# Altium PCB PJ1301-MAINPCB.PcbDoc (part 2 of 4)
Units mm, origin at the board's own origin, x right, y up, seen from the top; angles counter-clockwise.
Board outline 163.83 x 187.81 mm, 4 copper layers (Top Layer, GND, POWER, Bottom Layer); 435 components, 348 nets, 1618 pads, 913 vias.
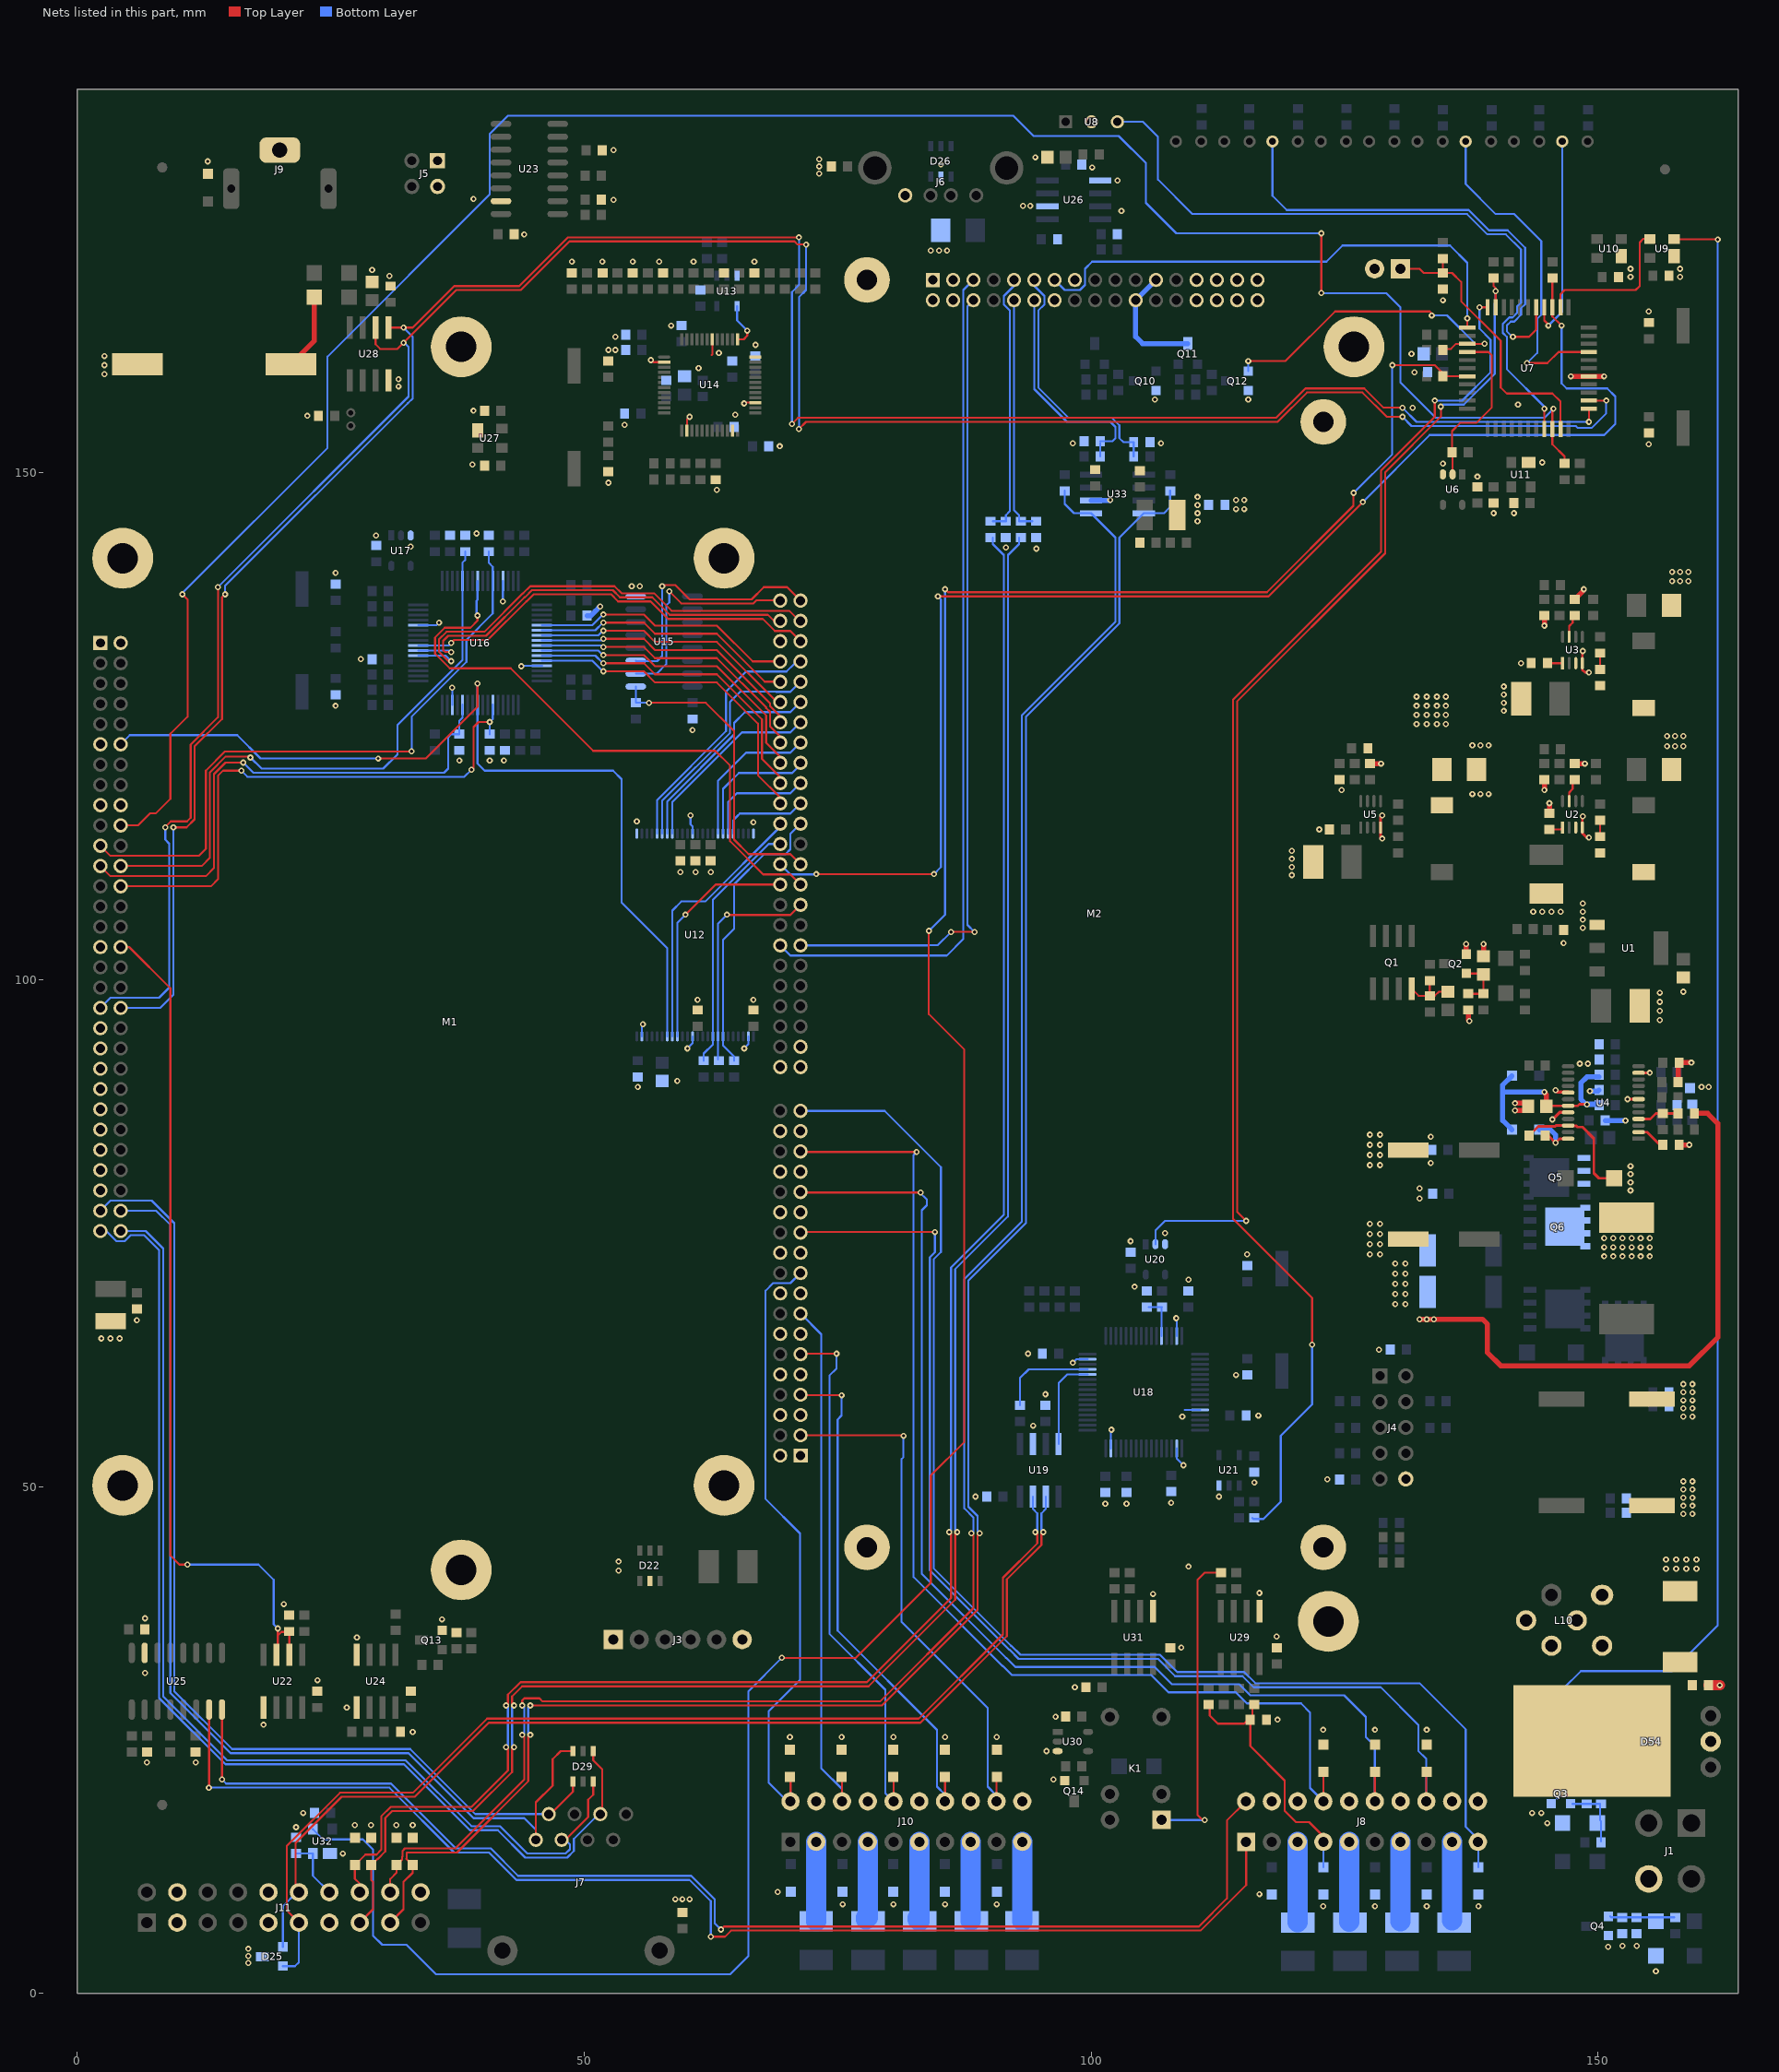
[diagram p4: the nets of this part, all layers, seen from the top]

## Part data
BT1: "Multicell Battery"
C1 C2 C4 C5 C6 C7 C9 C10 C11 C15 C17 C18 C22 C23 C25 C29 C30 C37 C39 C41 C44 C51 C53 C58 C59 C60 C61 C62 C63 C79 C80 C81 C82 C83 C84 C89 C91 C112 C115: library part "CAP NP_Dup2"
C3 C8 C16 C19 C20 C26 C38 C116: library part "CAP WP"
C12 C13 C46 C48 C50 C101 C102 C103 C104 C105 C106 C107 C108 C109 C110 C111 C120 C121 C122 C124 C125 C126: library part CAP
C14 C24 C27 C33 C35 C36 C40 C45 C47 C49 C55 C56 C57 C64 C65 C66 C67 C68 C71 C72 C73 C74 C75 C76 C77 C78 C90 C92 C93 C94 C95 C96 C97: library part Cap, "Capacitor"
C28 C31: library part 06033C223KAT1A_0
C32: library part 06033C103KAT2A
C34: library part 06035A470KAT1A_0
C42 C43: library part 06033C103KAT2A_0
C52 C54 C69 C70 C85 C86 C98 C99 C113 C114 C117 C118 C119: library part CAP_Dup1
C87 C88 C100 C123 C127 C128 C129 C130: library part "P_CAP NP"
D1 D3 D5 D7 D27 D28 D40 D54: library part 1N4148WS-7-F_SOD323-2
D2 D13 D14 D15 D16 D17 D18 D19 D20 D21 D23 D24: library part LN01401_1
D4 D6 D10: library part MMGZ5231BPTLL34
D8 D9 D11 D12: library part "Diode 11DQ03", "Schottky Rectifier"
D30 D31 D32 D33 D34 D35 D36 D37 D38 D39 D41 D42 D43 D44 D45 D46 D47 D48 D49 D50 D51 D52 D53: library part PESD
F2 F3 F4 F5 F6 F7 F9 F10 F11 F12 F13: library part 2A_32VDC_0467-002
J1 J5: library part "Header 4", "Header, 4-Pin"
J2: library part "Header 2", "Header, 2-Pin"
J3 J6: library part "Header 6", "Header, 6-Pin"
J4: library part "Header 5X2", "Header, 5-Pin, Dual row"
J7: library part NET
J8 J10: library part CON20
J9: library part BNC, "BNC Elbow Connector"
J11: library part "Header 20", "Header, 20-Pin"
K1: library part G5V-1_0
L1 L2 L3 L4: library part 4.7UH_CDH2D09BNP-4R7MC_0.7A_20%
L5 L6 L7 L8 L9: library part INDUCTOR_4
Q1: library part SI4431DY, "P-Channel 30V (D-S)  MOSFET"
Q2 Q3 Q4 Q10 Q12 Q13 Q14: library part MMBT3904_NL_SOT23-3
Q5 Q6 Q7 Q8: library part SI4410DY, "N-Channel 30V (D-S)  MOSFET"
Q9 Q11: library part AO3401L_SOT23-3_0
R1 R2 R3 R4 R5 R6 R11 R12 R13 R14 R15 R17 R18 R19 R20 R21 R23 R25 R28 R29 R31 R32 R33 R34 R35 R36 R37 R38 R39 R40 R41 R42 R43 R44 R45 R46 R47 R48 R49 R50 R51 R52 R101 R102 R106 R156 R157: library part CR16-1003FM
R7 R8 R9 R10 R121 R122 R123 R124 R125 R126 R127 R128 R129 R130 R131 R132 R133 R134 R135 R136 R137 R138 R139 R158 R159: library part R
R22 R24: library part CR16-1241FM
R26: library part CR16-1133FM
R27: library part CR16-8061FM
R30: library part CR16-224JM
R53 R54 R55 R56 R57 R58 R59 R60 R61 R62 R63 R64 R65 R66 R67 R68 R69 R70 R71 R72 R103 R104 R105 R107 R108 R109 R110 R111 R112 R113 R114 R115 R116 R117 R118 R119 R120 R152 R153 R154 R155: library part Res3, "Resistor"
R73 R74 R75 R76 R77 R78 R79 R80 R81 R82 R83 R84 R85 R86 R87 R88 R89 R90 R91 R92 R93 R97 R100: library part R_Dup1
R94: library part RESISTOR
R95 R96 R98 R99 R140 R141 R142 R143 R144 R145 R146 R147 R148 R149 R150 R151: library part P_R
U1: library part LT1963EST-1_4.8
U2 U3 U5: library part MP1482_5
U6 U17 U20 U30: library part 74LVC1G04GW_SOT353-5
U11 U27: library part MAX811
U12: library part K9GBG08U0A
U14: library part upd720114_QFP_4
U16: library part XR16V554IV_4
U18: "STM32 ARM-based 32-bit MCU with 64 Kbytes Flash, 64-pin LQFP, Industrial Temperature"
U22 U24: library part MAX485
U26: library part AP1212
Y1 Y2 Y3 Y4 Y5: library part CRYSTAL

## Free pads (board coordinates)
  round 6 hole 3: MT1(37.897,162.411) MT2(125.933,162.411) MT3(37.897,41.774) MT4(123.393,36.693)

## Via types
v1: diameter 0.6, hole 0.3, Top Layer to Bottom Layer, tented both sides, 912 vias
v2: diameter 0.6, hole 0.3, Top Layer to Bottom Layer, 1 vias

## Nets (pads, with @x,y where several pads share a name; then routed paths per layer and width w, separated by ;. In a path a pad name is that pad's centre, name@x,y a point inside that pad or via, vN(x,y) a via of type N, cw(c..) or ccw(c..) an arc to the next point about the centre after c; other vN are vias at no path point)
3G-LED: D14.2 U7.19 | length 33.2
  Top Layer w0.2: v1(143,160.8) 145,160.8 146.1,161.9 U7.19@149.1,161.9
  Bottom Layer w0.2: D14.2@136.941,182.661 136.941,178.459 139.9,175.5 141.734,175.5 144.4,172.834 144.4,165.566 144,165.166 144,161.8 v1(143,160.8)
485-EN: M1.A32 R122.1 U22.2 U22.3 | length 84.9
  Top Layer w0.2: M1.A32@4.3,103.2 5.131,103.2 9.2,99.131 9.2,43.2 10.1,42.3 v1(10.9,42.3) ; U22.3@19.665,33.4 19.8,33.535 19.8,35.3 ; v1(19.8,36) 19.8,35.3 ; U22.2@20.935,33.4 20.935,35.665 20.165,35.665 19.8,35.3
  Bottom Layer w0.2: v1(10.9,42.3) 17.9,42.3 19.4,40.8 19.4,36.4 v1(19.8,36)
AGND: C127.1 C128.1 C129.2 C130.2 M2.14 M2.15 R146.2 R147.2 R148.2 R149.2 R150.1 U33.6 | length 1.9
  Bottom Layer w0.2: v1@101.865,147.265 v1(101.9,147.3)
  Bottom Layer w0.508: U33.6@100,147.265 v1@101.865,147.265
  other v1: 94.6,142.5 91.6,142.6 110.5,145.2 110.5,146 110.5,146.8 110.5,147.6 98.2,152.9 106.9,152.9
AIN1: D31.2 J8.8 M1.C31 | length 110.3
  Top Layer w0.2: M1.C31@71.352,83.049 71.401,83 v1(82.8,83) ; J8.8@122.907,18.951 D31.2@122.907,21.843
  Bottom Layer w0.2: v1(82.8,83) 82.5,82.7 82.5,41.069 91.269,32.3 91.3,32.3 92.2,31.4 105.937,31.4 107.637,29.7 114.272,29.7 115.372,28.6 120.7,28.6 121.6,27.7 121.6,20.259 J8.8@122.907,18.951
AIN2: D32.2 J8.12 M1.C27 | length 111.3
  Top Layer w0.2: M1.C27@71.352,79.049 71.401,79 v1(83.2,79) ; J8.12@127.987,18.951 D32.2@127.987,21.837
  Bottom Layer w0.2: v1(83.2,79) 83.1,79 83.8,78.3 83.8,77.751 83.3,77.251 83.3,41.4 91.6,33.1 91.631,33.1 92.531,32.2 106.269,32.2 107.969,30.5 114.603,30.5 115.703,29.4 124.966,29.4 127.1,27.266 127.1,25.3 127.987,24.413 J8.12@127.987,18.951
AIN3: D33.2 J8.16 M1.C23 | length 112
  Top Layer w0.2: M1.C23@71.403,75.1 v1(84.6,75.1) ; J8.16@133.067,18.951 D33.2@133.067,21.817
  Bottom Layer w0.2: v1(84.6,75.1) 84.6,73.1 84.1,72.6 84.1,41.734 91.934,33.9 91.963,33.9 92.863,33 106.6,33 108.3,31.3 114.934,31.3 116.034,30.2 128.566,30.2 132.267,26.498 132.267,23.933 133.067,23.133 J8.16@133.067,18.951
AIN4: D34.2 J10.2 M1.C19 | length 60.6
  Top Layer w0.2: J10.2@70.361,18.951 D34.2@70.361,21.289
  Bottom Layer w0.2: J10.2@70.361,18.951 70.049,18.951 68.2,20.8 68.2,27.834 71.3,30.934 71.3,45.366 67.9,48.766 67.9,69.3 68.649,70.049 70.352,70.049 M1.C19@71.352,71.049
AIN5: D41.2 J10.6 M1.C15 | length 52.2
  Top Layer w0.2: J10.6@75.441,18.951 D41.2@75.441,21.309
  Bottom Layer w0.2: M1.C15@71.352,67.049 71.366,67.049 73.4,65.015 73.4,22.207 75.441,20.166 J10.6@75.441,18.951
AIN6: D42.2 J10.10 M1.C11 | length 52.9
  Top Layer w0.2: M1.C11@71.403,63.1 v1(74.9,63.1) ; J10.10@80.521,18.951 D42.2@80.521,21.329
  Bottom Layer w0.2: v1(74.9,63.1) 74.9,61.634 74.2,60.934 74.2,35.466 79.721,29.944 79.721,19.751 J10.10@80.521,18.951
AIN7: D43.2 J10.14 M1.C7 | length 51.1
  Top Layer w0.2: M1.C7@71.352,59.049 71.401,59 v1(75.4,59) ; J10.14@85.601,18.951 D43.2@85.6,21.35
  Bottom Layer w0.2: v1(75.4,59) 75.4,57 75,56.6 75,35.797 84.8,25.997 84.8,20.4 85.601,19.599 J10.14@85.601,18.951
AIN8: D44.2 J10.18 M1.C3 | length 52.6
  Top Layer w0.2: M1.C3@71.352,55.049 81.451,55.049 v1(81.5,55) ; J10.18@90.681,18.951 D44.2@90.681,21.331
  Bottom Layer w0.2: v1(81.5,55) 81.5,52.9 81.3,52.7 81.3,36.666 89.8,28.166 89.8,20.4 90.681,19.519 J10.18@90.681,18.951
ALARM-LED: D20.2 U7.27 | length 47.2
  Top Layer w0.2: v1(141.6,163.4) 143.2,163.4 143.9,164.1 U7.27@143.9,166.3
  Bottom Layer w0.2: D20.2@117.891,182.661 117.891,177.309 119.3,175.9 137.237,175.9 139.237,173.9 141.072,173.9 142.8,172.172 142.8,166.6 142.4,166.2 142.4,165.566 141.734,164.9 141.4,164.9 141,164.5 141,163.951 141.552,163.4 v1(141.6,163.4)
ALARM-SW: R139.2 U7.40 U32.3 | length 272
  Top Layer w0.2: v1(69.5,33.1) 76.8,33.1 84.2,40.5 84.2,51.1 87.5,54.4 87.5,93.1 84,96.6 v1(84,104.8) ; v1(85.6,138.5) 85.9,138.2 117.334,138.2 125.867,146.733 125.867,147.967 v1(125.9,148) ; v1(129.7,160.6) 133.9,160.6 134.7,159.8 R139.2@134.7,159.5 U7.40@137.1,159.5
  Bottom Layer w0.2: U32.3@23.25,16.2 24.25,15.2 28.2,15.2 29.2,14.2 29.2,5.7 30.1,4.8 32.5,4.8 35.4,1.9 64.4,1.9 66.2,3.7 66.2,29.8 v1(69.5,33.1) ; v1(84,104.8) 85.6,106.4 v1(85.6,138.5) ; v1(125.9,148) 129.7,151.8 v1(129.7,160.6)
ALARM-SW-IN: C126.1 J11.14 U32.2 | length 6.1
  Bottom Layer w0.2: C126.1@21.6,13.8 U32.2@23.25,13.8 23.25,11.614 J11.14@24.883,9.981
AOUT: D30.2 J8.19 M1.C35 | length 129.1
  Bottom Layer w0.2: M1.C35@71.352,87.049 79.651,87.049 85.2,81.5 85.2,73.134 84.5,72.434 84.5,41.9 92.1,34.3 92.128,34.3 93.028,33.4 106.8,33.4 108.5,31.7 115.1,31.7 116.2,30.6 125.1,30.6 132.4,30.6 136.947,26.053 136.947,16.453 138.147,15.253 J8.19@138.147,14.951 ; D30.2@138.2,12.45 J8.19@138.2,14.899
AUD-IN_N: D51.2 J11.16 R144.2 | length 186.6
  Top Layer w0.2: J11.16@27.884,9.981 27.884,10.817 27.4,11.3 D51.2@27.4,12.65 28.442,13.692 29.526,13.692 30,14.166 30,17.466 30.934,18.4 38.9,18.4 42.5,22 42.5,24.1 v1(42.3,24.3) ; v1(42.3,28.4) 42.4,28.4 42.5,28.5 42.5,29.466 43.734,30.7 77.9,30.7 86.2,39 86.2,45.3 v1(86,45.5)
  Bottom Layer w0.2: v1(42.3,24.3) 42.5,24.5 v1@42.5,28.4 ; v1(86,45.5) 86.2,45.7 86.2,71.6 91.4,76.8 91.4,141.891 91.391,141.9 91.351,141.9 90.3,142.951 R144.2@90.3,143.6
AUD-IN_P: D50.2 J11.15 R143.2 | length 188.9
  Top Layer w0.2: J11.15@27.884,6.981 29.2,8.297 29.2,11 29,11.2 D50.2@29,12.65 29.642,13.292 29.692,13.292 30.4,14 30.4,17.3 31.1,18 39.066,18 42.9,21.834 42.9,24.1 v1(43.1,24.3) ; v1(43.1,28.4) 43,28.4 42.9,28.5 42.9,29.3 43.9,30.3 78.066,30.3 86.6,38.834 86.6,45.3 v1(86.8,45.5)
  Bottom Layer w0.2: v1@42.9,28.4 42.9,24.5 v1(43.1,24.3) ; v1(86.8,45.5) 86.6,45.7 86.6,71.434 91.8,76.634 91.8,141.891 91.809,141.9 91.849,141.9 92.9,142.951 R143.2@92.9,143.6
AUD-OUT_N: D53.2 J11.18 R141.2 U33.5 | length 196.1
  Top Layer w0.2: J11.18@30.883,9.981 30.883,11.284 31.5,11.9 D53.2@31.5,12.65 32.058,13.208 32.058,13.457 32.1,13.499 32.1,14.066 32.334,14.3 37.3,14.3 44.1,21.1 44.1,25.3 v1(43.9,25.5) ; v1(43.9,28.4) 43.9,28.9 44.1,29.1 45.6,29.1 45.9,28.8 79.2,28.8 88.4,38 88.4,45.2 v1(88.2,45.4)
  Bottom Layer w0.2: v1(43.9,25.5) 44.1,25.7 44.1,28.2 v1(43.9,28.4) ; v1(88.2,45.4) 88.3,45.4 88.4,45.5 88.4,46.934 87.5,47.834 87.5,70.466 93.183,76.149 93.183,126.083 102.4,135.3 102.4,143.595 U33.5@100,145.995 98.305,145.995 97.4,146.9 R141.2@97.4,148.2
AUD-OUT_P: D52.2 J11.17 R151.2 U33.4 | length 199.1
  Top Layer w0.2: J11.17@30.883,6.981 32.2,8.297 32.2,11 33.1,11.9 D52.2@33.1,12.65 32.458,13.292 32.5,13.333 32.5,13.9 37.466,13.9 44.5,20.934 44.5,25.3 v1(44.7,25.5) ; v1(44.7,28.4) 79.366,28.4 88.8,37.834 88.8,45.2 v1(89,45.4)
  Bottom Layer w0.2: v1(44.7,25.5) 44.5,25.7 44.5,28.2 v1(44.7,28.4) ; v1(89,45.4) 88.9,45.4 88.8,45.5 88.8,47.1 87.9,48 87.9,70.3 93.583,75.983 93.583,125.917 102.8,135.134 102.8,143.595 U33.4@105.2,145.995 107.195,145.995 107.8,146.6 R151.2@107.8,148.2
BOOT0: R107.2 R108.2 U18.60 | length 4.1
  Bottom Layer w0.2: R108.2@105.7,67.7 R107.2@107,67.7 ; U18.60@106.95,64.85 R107.2@106.95,67.65
C-AUDIO-IN_N: M2.9 R144.1 R147.1 | length 25.9
  Bottom Layer w0.2: R144.1@90.3,145.2 R147.1@91.6,145.2 91.6,145.791 92,146.191 92,165.986 91.4,166.586 91.4,167.414 92.4,168.414 M2.9@92.4,169
C-AUDIO-IN_P: M2.10 R143.1 R146.1 | length 23.3
  Bottom Layer w0.2: M2.10@92.4,167 92.4,146.291 92.9,145.791 92.9,145.2 R146.1@94.2,145.2
C-AUDIO-OUT_N: M2.11 R145.1 R149.1 | length 25.5
  Top Layer w0.2: M2.11@94.4,168.414 M2.11@94.4,169
  Bottom Layer w0.2: M2.11@94.4,169 94.4,168.414 95.4,167.414 95.4,166.586 94.8,165.986 94.8,158.4 97.8,155.4 102.066,155.4 102.8,154.666 102.8,153.4 103.2,153 R149.1@104.2,153 ; R145.1@104.2,151.6 R149.1@104.2,152.9
C-AUDIO-OUT_P: M2.12 R142.1 R148.1 | length 22.3
  Bottom Layer w0.2: M2.12@94.4,167 94.4,158.234 97.634,155 101.9,155 102.4,154.5 102.4,153.4 102.1,153.1 R148.1@100.9,153.1 ; R142.1@100.9,151.6 R148.1@100.9,152.9
C-PWR-CTRL: R39.2 U6.2 U7.37 | length 16.9
  Top Layer w0.2: U6.2@135.65,149.827 135.65,151.95 R39.2@135.6,152 135.6,154.1 136.4,154.9 138,154.9 139.5,156.4 139.5,161.6 139.2,161.9 U7.37@137.1,161.9
CAM1: C120.1 C121.1 D36.2 J8.7 R133.2 | length 25.4
  Top Layer w0.2: C120.1@111.7,28.5 111.7,27.4 112.5,26.6 115.1,26.6 R133.2@115.6,27.1 ; C121.1@115.9,28.5 115.9,27.2 R133.2@115.7,27 115.7,24.4 119.1,21 119.1,18 120.2,16.9 121.5,16.9 122.907,15.493 J8.7@122.907,14.951
  Bottom Layer w0.2: D36.2@122.9,12.45 J8.7@122.9,14.944
CAM1B: K1.1 R131.2 | length 30.9
  Top Layer w0.2: v1(111.2,17.1) 111,17.1 110.5,17.6 110.5,40.8 111.2,41.5 R131.2@112.8,41.5
  Bottom Layer w0.2: K1.1@106.96,17.1 v1(111.2,17.1)
CAN-BOOT: R106.2 U7.32 U20.2 | length 117.5
  Top Layer w0.2: v1(115.3,76.2) 114.4,77.1 114.4,127.434 129,142.034 129,150.034 134.5,155.534 v1(134.5,156.5) ; R106.2@139.7,169.2 139.7,168.4 139.9,168.2 v1(139.9,167.9) U7.32@139.9,166.3
  Bottom Layer w0.2: U20.2@106.35,73.9 106.35,75.25 107.3,76.2 v1(115.3,76.2) ; v1(134.5,156.5) 134.7,156.7 136.766,156.7 139.8,159.734 139.8,166.7 139.9,166.8 v1(139.9,167.9)
CAN-RST: R120.1 U7.33 | length 139.2
  Top Layer w0.2: v1(121.8,64) 121.8,68.6 114,76.4 114,127.6 128.6,142.2 128.6,150.2 133.9,155.5 v1(133.9,157.1) ; v1(138.3,166.3) U7.33@139.1,166.3
  Bottom Layer w0.2: R120.1@115.9,46.9 116,46.8 117,46.8 118.7,48.5 118.7,55 121.8,58.1 v1(121.8,64) ; v1(133.9,157.1) 136.6,157.1 139.4,159.9 139.4,163.1 138.3,164.2 v1(138.3,166.3)
CAN-RXD: U18.44 U19.4 | length 9.2
  Bottom Layer w0.2: U19.4@96.805,54.2 96.805,60.205 97.65,61.05 U18.44@99.65,61.05
CAN-TXD: R104.2 U18.45 | length 9.7
  Bottom Layer w0.2: R104.2@93,58 93,60.7 93.85,61.55 U18.45@99.65,61.55
CAN_N: D25.1 J11.12 U19.6 | length 105.1
  Top Layer w0.2: J11.12@21.883,9.981 21.55,10.314 21.55,14.85 26.1,19.4 33.3,19.4 40.6,26.7 83.166,26.7 91.7,35.234 91.7,40.834 95.1,44.234 95.1,45.3 v1(95.3,45.5)
  Bottom Layer w0.2: D25.1@20.3,4.6 20.3,8.6 21.681,9.981 J11.12@21.883,9.981 ; v1@95.1,45.6 95.1,47.357 95.535,47.792 U19.6@95.535,49
CAN_P: D25.2 J11.11 U19.7 | length 108.1
  Top Layer w0.2: J11.11@21.883,6.981 20.683,8.181 20.683,14.549 25.934,19.8 33.134,19.8 40.434,27.1 83,27.1 91.3,35.4 91.3,41 94.7,44.4 94.7,45.3 v1(94.5,45.5)
  Bottom Layer w0.2: D25.2@20.3,2.695 21.495,2.695 21.883,3.083 J11.11@21.883,6.981 ; U19.7@94.265,49 94.265,47.792 94.7,47.357 v1@94.7,45.6
CELLULAR-PWR: C38.1 L4.2 M2.1 M2.2 M2.3 M2.4 R34.1
  other v1: 132.1,125.2 133.1,125.2 134.1,125.2 135,125.2 132.1,126.1 133.1,126.1 134.1,126.1 135,126.1 132.1,127 133.1,127 134.1,127 135,127 132.1,127.9 133.1,127.9 134.1,127.9 135,127.9
CELLULAR-RESET: M2.13 U7.34 | length 51
  Top Layer w0.2: U7.34@137.1,164.3 v1(137.1,165.2)
  Bottom Layer w0.2: M2.13@96.4,169 97.4,168 98.9,168 99.4,168.5 99.4,170.1 100.1,170.8 123.2,170.8 124.8,172.4 135.4,172.4 137.1,170.7 v1(137.1,165.2)
CP1: F4.2 J8.9 | length 7.9
  Bottom Layer w2: F4.2@125.447,7.086 J8.9@125.447,14.951
CP2: F5.2 J8.13 | length 7.8
  Bottom Layer w2: F5.2@130.527,7.139 J8.13@130.527,14.951
CP3: F6.2 J8.17 | length 7.8
  Bottom Layer w2: F6.2@135.607,7.193 J8.17@135.607,14.951
CP4: F7.2 J10.3 | length 7.8
  Bottom Layer w2: F7.2@72.901,7.101 J10.3@72.901,14.951
CP5: F9.2 J10.7 | length 7.7
  Bottom Layer w2: F9.2@77.8,7.3 F9.2@77.8,7.481 ; F9.2@77.981,7.481 J10.7@77.981,14.951
CP6: F10.2 J10.11 | length 7.9
  Bottom Layer w2: F10.2@82.9,7.461 82.9,7.3 F10.2@83.1,7.1 ; F10.2@83.061,7.461 J10.11@83.061,14.951
CP7: F11.2 J10.15 | length 7.8
  Bottom Layer w2: F11.2@88.141,7.159 J10.15@88.141,14.951
CP8: F12.2 J10.19 | length 7.8
  Bottom Layer w2: F12.2@93.221,7.121 J10.19@93.221,14.951
DPC-RXD: J8.2 U25.8 | length 125.2
  Top Layer w0.2: U25.8@14.29,28 14.29,21.11 v1(14.3,21.1) ; v1(63.5,6.3) 63.8,6.6 110.634,6.6 113.4,9.366 113.4,17.064 J8.2@115.287,18.951
  Bottom Layer w0.2: v1(14.3,21.1) 14.7,20.7 30.966,20.7 37.366,14.3 40.8,14.3 43.5,11.6 60.566,11.6 62.9,9.266 62.9,6.9 v1(63.5,6.3)
DPC-TXD: J8.1 U25.7 | length 124.5
  Top Layer w0.2: v1(13,20.3) 13.02,20.32 U25.7@13.02,28 ; v1(62.5,5.6) 63.9,5.6 64.5,6.2 110.8,6.2 115.287,10.687 J8.1@115.287,14.951
  Bottom Layer w0.2: v1(13,20.3) 30.8,20.3 37.2,13.9 40.634,13.9 43.334,11.2 60.4,11.2 62.5,9.1 v1(62.5,5.6)
DPP: F3.2 J8.5 | length 7.9
  Bottom Layer w2: F3.2@120.367,7.033 J8.5@120.367,14.951
E0RX_N: D29.4 J7.6 M1.A59 | length 110.4
  Top Layer w0.2: D29.4@50.9,23.9 50.9,23 51.8,22.1 51.8,17.89 J7.6@51.6,17.69
  Bottom Layer w0.2: M1.A59@2.3,75.2 2.886,75.2 3.886,74.2 4.714,74.2 5.314,74.8 6.6,74.8 8.1,73.3 8.1,29.134 14.634,22.6 32.234,22.6 38.734,16.1 41.5,16.1 44.2,13.4 48.341,13.4 49,14.059 49,15.234 51.456,17.69 J7.6@51.6,17.69
E0RX_P: D29.3 J7.3 M1.A60 | length 104.5
  Top Layer w0.2: J7.3@47.79,15.15 48.15,15.15 50.4,17.4 50.4,19.1 50.9,19.6 D29.3@50.9,20.9
  Bottom Layer w0.2: M1.A60@4.3,75.2 6.766,75.2 8.5,73.466 8.5,29.3 14.8,23 32.4,23 38.9,16.5 41.7,16.5 44.4,13.8 48.175,13.8 48.6,14.225 48.6,14.7 48.15,15.15 J7.3@47.79,15.15
E0TX_N: D29.1 J7.2 M1.A57 | length 101
  Top Layer w0.2: J7.2@46.52,17.69 46.69,17.69 48.9,19.9 D29.1@48.9,20.9
  Bottom Layer w0.2: M1.A57@2.3,77.2 3.3,78.2 7.366,78.2 9.6,75.966 9.6,52.4 9.6,29.8 15.3,24.1 32.866,24.1 39.276,17.69 J7.2@46.52,17.69
E0TX_P: D29.6 J7.1 M1.A58 | length 105.2
  Top Layer w0.2: J7.1@45.25,15.15 45.25,18.85 46.9,20.5 46.9,23.1 47.7,23.9 D29.6@48.9,23.9
  Bottom Layer w0.2: M1.A58@4.3,77.2 7.8,77.2 9.2,75.8 9.2,52.4 9.2,29.634 15.134,23.7 32.7,23.7 39.11,17.29 44.1,17.29 45.25,16.14 J7.1@45.25,15.15
EBIA0: M1.B43 U16.24 | length 41.7
  Top Layer w0.2: v1(36.9,133.2) 37.2,133.5 40.5,133.5 44.3,137.3 44.331,137.3 45.031,138 52.669,138 53.369,137.3 56.569,137.3 58.297,135.572 67.628,135.572 68.828,134.372 70.352,134.372 M1.B43@71.352,133.372
  Bottom Layer w0.2: U16.24@33.65,132.95 36.65,132.95 v1(36.9,133.2)
EBIA1: M1.B46 U16.23 | length 41.7
  Top Layer w0.2: v1(36.9,132.3) 36.3,132.3 36.1,132.5 36.1,133.4 36.6,133.9 40.334,133.9 44.134,137.7 44.166,137.7 44.866,138.4 52.834,138.4 53.534,137.7 56.734,137.7 58.462,135.972 68.128,135.972 68.728,135.372 M1.B46@69.352,135.372
  Bottom Layer w0.2: U16.23@33.65,132.45 36.75,132.45 v1(36.9,132.3)
EBIA2: M1.B45 U16.22 | length 45.7
  Top Layer w0.2: v1(36.9,131.4) 36.634,131.4 35.7,132.334 35.7,133.566 36.434,134.3 40.169,134.3 43.969,138.1 44,138.1 44.7,138.8 53,138.8 53.7,138.1 56.9,138.1 58.628,136.372 70.228,136.372 70.952,135.648 71.352,135.648 M1.B45@71.352,135.372
  Bottom Layer w0.2: U16.22@33.65,131.95 36.35,131.95 v1(36.9,131.4)
EBIA3: M1.B48 U15.2 | length 22.3
  Top Layer w0.2: v1(58.4,138.3) 59.6,137.1 66.7,137.1 67,137.4 69.324,137.4 M1.B48@69.352,137.372
  Bottom Layer w0.2: U15.2@55.1,130.17 57.17,130.17 58.1,131.1 58.1,136.9 58.4,137.2 v1(58.4,138.3)
EBIA4: M1.B47 U15.3 | length 24.9
  Top Layer w0.2: v1@57.8,138.9 59,138.9 60.4,137.5 66.534,137.5 67.734,138.7 70.024,138.7 M1.B47@71.352,137.372
  Bottom Layer w0.2: U15.3@55.1,131.44 55.14,131.4 57.2,131.4 57.7,131.9 v1(57.7,138.8)
EBICS1: M1.B21 R73.1 U15.1 | length 30.7
  Top Layer w0.2: v1(56.4,127.3) 62,127.3 64.8,124.5 64.8,113.8 66.228,112.372 70.352,112.372 M1.B21@71.352,111.372
  Bottom Layer w0.2: U15.1@55.1,128.9 R73.1@55.1,127.3 v1(56.4,127.3)
EBID0: M1.B42 U16.53 | length 25.9
  Top Layer w0.2: v1(51.9,136) 55.9,136 57,134.9 63.1,134.9 66.628,131.372 M1.B42@69.352,131.372
  Bottom Layer w0.2: U16.53@45.85,134.95 50.801,134.95 51.851,136 v1(51.9,136)
EBID1: M1.B40 U16.54 | length 26.2
  Top Layer w0.2: v1(51.9,135.2) 55.9,135.2 57,134.1 63.1,134.1 67.828,129.372 M1.B40@69.352,129.372
  Bottom Layer w0.2: U16.54@45.85,134.45 51.101,134.45 51.851,135.2 v1(51.9,135.2)
EBID2: M1.B38 U16.55 | length 26.3
  Top Layer w0.2: v1(51.9,134.4) 55.9,134.4 57,133.3 63.1,133.3 M1.B38@69.028,127.372
  Bottom Layer w0.2: U16.55@45.85,133.95 51.401,133.95 51.851,134.4 v1(51.9,134.4)
EBID3: M1.B36 U16.56 | length 27.5
  Top Layer w0.2: v1(51.9,133.6) 55.9,133.6 57,132.5 63.1,132.5 68.352,127.248 68.352,126.958 69.352,125.958 M1.B36@69.352,125.372
  Bottom Layer w0.2: U16.56@45.85,133.45 51.75,133.45 v1(51.9,133.6)
EBID4: M1.B34 U16.57 | length 28.7
  Top Layer w0.2: v1(51.9,132.8) 55.9,132.8 57,131.7 63.1,131.7 67.952,126.848 67.952,126.792 68.352,126.392 68.352,124.958 69.352,123.958 M1.B34@69.352,123.372
  Bottom Layer w0.2: U16.57@45.85,132.95 51.75,132.95 v1(51.9,132.8)
EBID5: M1.B32 U16.58 | length 30
  Top Layer w0.2: v1(51.9,132) 55.9,132 57,130.9 63.1,130.9 67.952,126.048 67.952,123.358 69.352,121.958 M1.B32@69.352,121.372
  Bottom Layer w0.2: U16.58@45.85,132.45 51.401,132.45 51.851,132 v1(51.9,132)
EBID6: M1.B30 U16.59 | length 31.3
  Top Layer w0.2: v1(51.9,131.2) 55.9,131.2 57,130.1 63.1,130.1 67.552,125.648 67.552,121.758 69.352,119.958 M1.B30@69.352,119.372
  Bottom Layer w0.2: U16.59@45.85,131.95 51.101,131.95 51.851,131.2 v1(51.9,131.2)
EBID7: M1.B28 U16.60 | length 32.7
  Top Layer w0.2: v1(51.9,130.4) 55.9,130.4 57,129.3 63.1,129.3 67.152,125.248 67.152,120.158 69.352,117.958 M1.B28@69.352,117.372
  Bottom Layer w0.2: U16.60@45.85,131.45 50.801,131.45 51.851,130.4 v1(51.9,130.4)
EBIOE: M1.B19 U16.40 | length 60.3
  Top Layer w0.2: v1(39.5,135.9) 39.5,135.4 38.8,134.7 36.269,134.7 35.3,133.731 35.3,132.151 36.751,130.7 42.763,130.7 50.9,122.563 62.937,122.563 64.4,121.1 64.4,113.634 67.662,110.372 70.352,110.372 M1.B19@71.352,109.372
  Bottom Layer w0.2: v1(39.5,135.9) 39.4,136 39.4,137.349 39.5,137.449 U16.40@39.5,139.3
EBIWE: M1.A12 U12.18 U16.9 | length 90.9
  Top Layer w0.2: v1(29.7,121.8) 34.4,121.8 39.5,126.9 v1(39.5,129.2)
  Bottom Layer w0.2: M1.A12@4.3,123.2 5.2,124.1 15.8,124.1 18.1,121.8 v1(29.7,121.8) ; v1(39.5,129.2) 39.5,121.3 40.2,120.6 52.863,120.6 53.704,119.759 53.704,107.596 58.2,103.1 U12.18@58.2,94.4
EUARTA-INT: M1.A26 R87.1 U16.6 | length 54.9
  Top Layer w0.2: M1.A26@4.3,109.2 13.2,109.2 13.9,109.9 13.9,120.1 14.4,120.6 v1(16.2,120.6) ; v1(38.9,120.7) 39.1,120.9 39.1,124.9 39.6,125.4 v1(40.7,125.4)
  Bottom Layer w0.2: v1(16.2,120.6) 16.8,120 38.2,120 v1(38.9,120.7) ; R87.1@40.7,124.2 v1(40.7,125.4) 41,125.7 U16.6@41,127.1
EUARTB-INT: M1.A23 R88.1 U16.12 | length 52.7
  Top Layer w0.2: M1.A23@2.3,111.2 3.3,110.2 12.7,110.2 13.5,111 13.5,120.266 14.634,121.4 v1(16.4,121.4)
  Bottom Layer w0.2: v1(16.4,121.4) 17.4,120.4 36.2,120.4 36.6,120.8 36.6,123.9 36.9,124.2 R88.1@37.7,124.2 37.7,125.5 38,125.8 U16.12@38,127.1
EUARTC-INT: M1.A24 R89.1 U16.37 | length 60.6
  Top Layer w0.2: M1.A24@4.3,111.2 12.3,111.2 13.1,112 13.1,120.431 14.669,122 17,122 v1(17.1,121.9)
  Bottom Layer w0.2: v1(17.1,121.9) 18.2,120.8 30.2,120.8 31.6,122.2 31.6,125.1 38,131.5 U16.37@38,139.3 38,141.1 38.3,141.4 R89.1@38.3,142.2
EUARTD-INT: M1.A21 R90.1 U16.43 | length 63.1
  Top Layer w0.2: M1.A21@2.3,113.2 3.3,112.2 12,112.2 12.7,112.9 12.7,120.597 14.603,122.5 v1(33,122.5)
  Bottom Layer w0.2: v1(33,122.5) 33,125.934 38.4,131.334 38.4,133.5 41,136.1 U16.43@41,139.3 41,140.7 40.6,141.1 R90.1@40.6,142.2
FLASH-DB0: M1.B41 U12.29 | length 25.5
  Bottom Layer w0.2: U12.29@57.2,114.4 57.2,117.7 64,124.5 64,128.4 65.972,130.372 69.972,130.372 70.766,131.166 70.766,131.372 M1.B41@71.352,131.372
FLASH-DB1: M1.B39 U12.30 | length 23.6
  Bottom Layer w0.2: U12.30@57.7,114.4 57.7,117.634 64.4,124.334 64.4,127.4 65.4,128.4 68.91,128.4 68.938,128.372 70.352,128.372 M1.B39@71.352,129.372
FLASH-DB2: M1.B37 U12.31 | length 21
  Bottom Layer w0.2: U12.31@58.2,114.4 58.2,117.569 64.8,124.169 64.8,125.3 65.872,126.372 70.352,126.372 M1.B37@71.352,127.372
FLASH-DB3: M1.B35 U12.32 | length 19
  Bottom Layer w0.2: U12.32@58.7,114.4 58.7,117.503 65.569,124.372 70.352,124.372 M1.B35@71.352,125.372
FLASH-DB4: M1.B33 U12.41 | length 14.9
  Bottom Layer w0.2: U12.41@63.2,114.4 63.2,119.6 65.972,122.372 70.352,122.372 M1.B33@71.352,123.372
FLASH-DB5: M1.B31 U12.42 | length 13.2
  Bottom Layer w0.2: U12.42@63.7,114.4 63.7,118.8 65.272,120.372 70.528,120.372 71.352,121.196 M1.B31@71.352,121.372
FLASH-DB6: M1.B29 U12.43 | length 11
  Bottom Layer w0.2: U12.43@64.2,114.4 64.2,117.5 65.072,118.372 70.352,118.372 M1.B29@71.352,119.372
FLASH-DB7: M1.B27 U12.44 | length 8.6
  Bottom Layer w0.2: U12.44@64.7,114.4 64.7,115.7 65.117,116.117 65.372,116.372 70.352,116.372 M1.B27@71.352,117.372
GND: BT1.2 C3.2 C4.1 C5.1 C6.1 C7.1 C8.2 C9.1 C10.1 C11.1 C12.2 C13.2 C15.1 C16.2 C17.1 C18.1 C19.2 C20.2 C22.1 C23.1 C25.1 C26.2 C28.1 C29.1 C30.1 C32.1 C33.1 C34.2 C35.2 C37.1 C38.2 C39.1 C41.1 C42.2 C43.1 C44.2 C45.1 C46.1 C47.1 C48.1 C49.1 C50.1 C51.1 C52.1 C53.2 C54.1 C55.1 C56.1 C57.1 C58.1 C59.1 C60.1 C61.1 C62.1 C63.1 C64.1 C65.1 C66.1 C67.1 C68.1 C69.1 C70.1 C71.1 C73.1 C75.1 C76.1 C77.1 C78.2 C79.2 C80.1 C81.1 C82.1 C83.1 C84.2 C85.1 C86.1 C89.2 C90.1 C91.1 C92.1 C93.1 C94.1 C95.1 C96.1 C97.2 C98.1 C99.1 C100.1 C101.2 C103.2 C104.2 C106.2 C107.2 C109.2 C110.2 C112.1 C113.2 C114.2 C115.2 C116.2 C117.2 C118.2 C119.2 C122.2 C123.1 C124.2 C125.2 C126.2 D2.2 D5.2 D7.2 D10.2 D22.2 D25.3 D26.2 D30.1 D31.1 D32.1 D33.1 D34.1 D35.1 D36.1 D37.1 D38.1 D39.1 D41.1 D42.1 D43.1 D44.1 D45.1 D46.1 D47.1 D48.1 D49.1 D50.1 D51.1 D52.1 D53.1 J2.2 J3.1 J3.6 J4.10 J5.1 J5.2 J6.4 J8.4 J8.6 J8.10 J8.14 J8.18 J8.20 J9.2 J10.4 J10.8 J10.12 J10.16 J10.20 J11.3 J11.4 J11.9 J11.10 J11.13 J11.20 L7.2 L8.2 L9.2 L10.4 L10.5 L10.6 M1.A1 M1.A2 M1.A11 M1.A17 M1.A18 M1.A31 M1.A39 M1.A41 M1.A43 M1.A45 M1.A47 M1.A49 M1.A51 M1.A53 M1.A55 M1.B1 M1.B2 M1.B3 M1.B44 M1.C1 M1.C2 M1.C5 M1.C6 M1.C9 M1.C10 M1.C13 M1.C14 M1.C17 M1.C18 M1.C21 M1.C22 M1.C25 M1.C26 M1.C29 M1.C30 M1.C33 M1.C34 M1.MT5 M1.MT6 M1.MT7 M1.MT8 M2.27 M2.28 M2.29 M2.30 M2.31 M2.32 M2.33 M2.34 M2.MT9 M2.MT10 M2.MT11 M2.MT12 pad.MT1 pad.MT2 pad.MT3 pad.MT4 Q2.3 Q3.3 Q4.3 Q10.3 Q12.3 Q13.3 Q14.3 R6.1 R8.2 R10.2 R15.2 R21.2 R24.1 R27.2 R29.1 R31.1 R35.1 R37.2 R38.2 R59.2 R60.2 R61.2 R62.2 R65.2 R66.2 R87.2 R88.2 R89.2 R90.2 R103.1 R105.1 R108.1 R117.2 R122.2 R127.2 R128.2 R133.1 R138.2 R150.2 R159.2 U1.1 U2.4 U3.4 U4.7 U4.11 U4.17 U4.20 U5.4 U6.3 U7.16 U8.2 U9.1 U10.1 U11.1 U12.2 U12.13 U12.23 U12.25 U12.36 U12.48 U13.3 U14.2 U14.14 U14.23 U14.27 U14.36 U14.42 U15.8 U16.14 U16.28 U16.45 U16.61 U17.3 U18.12 U18.18 U18.31 U18.47 U18.63 U19.2 U20.3 U21.3 U22.5 U23.15 U24.4 U24.5 U25.15 U26.1 U26.6 U27.1 U28.4 U29.5 U30.3 U31.5 U32.1 | length 128.3
  Top Layer w0.2: v1(56.6,161.1) 56.8,160.9 U14.2@57.9,160.9 ; U14.14@60.15,154.15 60.15,155.25 v1(60.4,155.5) ; 62.6,161.6 62.65,161.65 U14.42@62.65,163.15 ; v1(65.792,156.825) 65.867,156.9 U14.27@66.9,156.9
  Top Layer w0.254: v1(128.7,113.9) 128.55,114.05 U5.4@128.55,115 128.55,116.05 v1(128.7,116.2) ; v1(148.5,116.1) 148.45,116.05 U2.4@148.45,115 148.45,114.45 148.9,114 v1(149.1,114) ; v1(148.5,132.4) 148.45,132.35 U3.4@148.45,131.2 148.45,130.55 148.7,130.3 v1(149.1,130.3)
  Top Layer w0.3: v1(145.5,86.2) 146.2,86.9 U4.20@147.05,86.9 ; v1(145.8,89.1) 145.996,88.904 147.05,88.904 U4.17@147.05,88.85 ; v1(152.9,88.2) U4.7@154,88.2 ; U4.11@154,90.8 v1(155.1,90.8)
  Top Layer w0.5: C41.1@127.5,121.3 v1(128.6,121.3) ; v1(132.4,66.5) v1(133.1,66.5) v1(133.8,66.5) 138.6,66.5 139.1,66 139.1,63.2 140.404,61.896 158.992,61.896 161.804,64.708 161.804,85.796 160.8,86.8 R24.1@159.4,86.8 ; Q2.3@137,102.505 v1(137,103.5) ; R6.1@137.2,97 137.2,96 v1(137.3,95.9) ; C11.1@138.7,102.3 v1(138.7,103.5) ; v1(141.8,87.1) 142.7,87.1 C35.2@143.1,87.5 142.8,87.8 v1(141.8,87.8) ; v1(144.7,118.7) R15.2@144.7,119.7 ; v1(144.7,134.9) R21.2@144.7,135.9 ; C17.1@145.2,116.4 v1(145.2,117.4) ; v1(147.3,159.5) U7.16@149.1,159.5 v1(150.6,159.5) ; C18.1@147.7,121.3 v1(148.7,121.3) ; C30.1@147.7,137.5 148.6,138.4 v1(148.6,138.5) ; R27.2@157.9,89.9 157.9,91.7 C43.1@158,91.8 v1(159.2,91.8) ; C28.1@158,83.7 v1(159,83.7)
  Bottom Layer w0.2: U16.28@33.65,134.95 35.45,134.95 v1(35.7,135.2) ; U16.14@37,127.1 v1(37,128.8) ; v1(42,137.3) U16.45@42,139.3 ; v1@43.85,130.95 U16.61@45.85,130.95 ; U12.23@55.7,94.4 55.7,95.5 v1(55.8,95.6) ; v1(60.2,93.2) 60.2,93.225 60.7,93.725 U12.13@60.7,94.4 ; v1(60.5,116.2) 60.5,115.3 60.7,115.1 U12.36@60.7,114.4 ; v1(65.8,93.2) 65.8,93.225 66.2,93.625 U12.2@66.2,94.4 ; v1(98.2,62.2) 98.55,62.55 U18.47@99.65,62.55 ; U18.31@101.95,53.75 v1@101.95,55.55 ; U18.18@108.45,53.75 108.45,52.75 v1(109.1,52.1) ; U18.63@108.45,64.85 v1@108.45,66.55 ; 109.25,57.55 U18.12@110.75,57.55
  Bottom Layer w0.3: 146,19.3 146.393,19.693 146.959,19.693 147.566,20.3 R8.2@148.9,20.3 C12.2@150.3,20.3
  Bottom Layer w0.5: C82.1@50.3,135.9 50.696,135.9 51.096,136.3 51.096,136.333 51.567,136.804 v1@51.6,136.804 ; v1(149.2,89) 150,89 R35.1@150.1,89.1 ; C33.1@150.7,86.1 v1(152.7,86.1)
  other v1: 155.7,2.2 16.9,3 16.9,3.7 16.9,4.4 151,4.6 152.4,4.7 153.8,4.7 122.9,8.6 128,8.6 133.1,8.6 138.2,8.6 75.5,8.8 80.5,8.8 85.6,8.8 90.7,8.8 59,9.3 59.7,9.3 60.4,9.3 116.6,9.8 69.1,10 26.2,13.8 21.6,16.4 27.4,16.6 29,16.6 31.5,16.6 33.1,16.6 145,16.8 22.3,17.8 143.5,17.8 144.4,17.8 96.3,21.1 6.9,22.8 11.7,22.8 95.6,23.9 70.3,25.3 75.4,25.3 80.5,25.3 85.6,25.3 90.7,25.3 33.1,25.8 122.9,26 128,26 133.1,26 18.4,26.5 118.4,27 96.5,27.3 26.6,28.2 98.4,30.2 23.7,30.9 6.7,31.6 108.9,34.1 27.6,35.1 118.3,35.2 36,36.9 6.7,37 20.4,38.4 106.1,39.4 116.6,39.5 53.4,41.7 109.6,42.1 53.4,42.6 158.4,47.3 159.3,47.3 158.4,48.1 159.3,48.1 101.4,48.3 103.5,48.3 107.9,48.4 158.4,48.9 159.3,48.9 88.6,49 112.6,49 158.4,49.7 159.3,49.7 116.1,50.4 158.4,50.5 159.3,50.5 123.3,50.7 102,55.6 94.3,56 109,56.9 158.4,56.9 159.3,56.9 116.5,57 158.4,57.7 159.3,57.7 158.4,58.5 159.3,58.5 95.5,59.1 158.4,59.3 159.3,59.3 158.4,60.1 159.3,60.1 114.3,61 93.8,63.1 128.4,63.5 2.4,64.6 3.3,64.6 4.2,64.6 5.9,66.4 108.4,66.6 130,68 131,68 130,69 131,69 104.3,69.7 130,70 131,70 109.6,70.4 130,71 131,71 130,72 131,72 115.4,72.9 127.5,72.9 128.5,72.9 127.5,73.9 128.5,73.9 103.9,74.2 127.5,74.9 128.5,74.9 107.3,75 127.5,75.9 128.5,75.9 132.4,78.4 132.4,79.4 127.5,81.7 128.5,81.7 133.5,81.9 127.5,82.7 128.5,82.7 127.5,83.7 128.5,83.7 133.5,84.5 127.5,84.7 128.5,84.7 55.3,89.4 160.2,89.4 160.9,89.4 59.2,90 148.2,91.7 149,91.7 156.1,96 156.1,96.9 156.1,97.8 61.2,98 66.7,98 156.1,98.7 158.4,98.8 146.6,103.6 148.5,105.1 148.5,105.9 143.6,106.7 144.5,106.7 145.4,106.7 146.3,106.7 148.5,106.7 148.5,107.5 119.8,110.3 59.5,110.6 61,110.6 62.5,110.6 119.8,111.1 119.8,111.9 119.8,112.7 122.5,114.8 66.7,115.5 55.2,115.6 137.6,118.3 138.4,118.3 139.2,118.3 124.7,118.7 37.7,121.6 40.7,121.6 42.1,121.6 156.8,123 157.6,123 158.4,123 137.6,123.1 138.4,123.1 139.2,123.1 156.8,124 157.6,124 158.4,124 60.7,124.6 140.7,126.5 25.5,127 140.7,127.3 140.7,128.1 140.7,128.9 43.8,130.9 142.4,131.2 28,131.6 51.6,136.8 54.7,138.8 55.5,138.8 157.3,139.3 158.1,139.3 158.9,139.3 25.5,140.1 157.3,140.2 158.1,140.2 158.9,140.2 32.9,142.7 29.5,143.8 39.4,144 139.7,146 141.7,146 114.3,146.4 115.1,146.4 114.3,147.3 115.1,147.3 63.1,148.3 52.4,149 138.1,149.6 39,150.8 134.7,150.9 144.5,151 69.3,152.6 155,152.8 54,154.7 22.7,155.6 64.9,155.7 39.1,156.1 131.7,156.4 142.1,156.7 106.3,157.2 115.5,157.2 31.7,158.5 31.7,159.2 2.7,159.7 131.9,159.9 61.3,160.3 2.7,160.6 2.7,161.5 131.6,161.7 63.3,161.8 52.4,162.1 53.1,162.1 66.9,162.6 53.1,163.4 58.6,164.5 155,165.9 134.7,167 153.2,169.3 158.1,169.3 30.8,169.4 29.1,170 153.2,170.1 158.1,170.1 48.8,170.8 51.8,170.8 54.8,170.8 57.4,170.8 60.8,170.8 66.8,170.8 84.2,171.9 85,171.9 85.8,171.9 44.1,173.5 103,175.8 93.3,176.3 94,176.3 52.9,176.9 39.1,177 102.6,178.8 73.2,179.5 100.1,180.1 73.2,180.2 85.2,180.4 12.9,180.7 73.2,180.9 94.5,181.1 52.9,181.8
GPRS-RXD: M1.B13 M2.6 | length 80.5
  Top Layer w0.2: v1(86.2,104.7) v1(88.5,104.7)
  Bottom Layer w0.2: M1.B13@71.352,103.372 83.972,103.372 84,103.4 84.9,103.4 v1(86.2,104.7) ; M2.6@88.4,167 87.8,166.4 87.8,105.4 v1(88.5,104.7)
GPRS-TXD: M1.B14 M2.5 | length 84.6
  Bottom Layer w0.2: M1.B14@69.352,103.372 70.352,102.372 85.772,102.372 87.4,104 87.4,168 M2.5@88.4,169
GPS-LED: D19.2 U7.26 | length 20.7
  Top Layer w0.2: U7.26@144.7,166.3 144.7,165 145.1,164.6 v1(145.1,164.5)
  Bottom Layer w0.2: v1(145.1,164.5) 146.466,165.866 D19.2@146.466,182.661
GPS-PWR: M2.22 M2.23 Q11.3 | length 11.8
  Bottom Layer w0.5: M2.23@106.4,169 M2.22@104.4,167 104.4,163.4 105.068,162.732 Q11.3@109.535,162.732
GPS-PWR-CTRL: Q12.2 R100.1 U7.36 | length 32.1
  Top Layer w0.2: v1(115.5,161) 119.166,161 124.066,165.9 133.4,165.9 133.6,165.7 v1(133.6,165.5) ; R100.1@134.7,162.2 135.5,162.2 136,162.7 U7.36@137.1,162.7 v1(138.8,162.7)
  Bottom Layer w0.2: Q12.2@115.5,160 v1(115.5,161) ; v1(133.6,165.5) 135.1,165.5 137.9,162.7 v1(138.8,162.7)
HAND-IN: M1.A20 R50.2 U7.9 | length 219.4
  Top Layer w0.2: M1.A20@4.3,115.2 6,115.2 7.183,116.383 7.751,116.383 9.2,117.831 9.2,124.231 10.9,125.931 10.9,137.5 v1(10.4,138) ; v1(122.7,167.7) v1(122.7,173.6) ; v1(145.6,156.3) 145.5,156.2 U7.9@145.5,154.3 145.5,152.8 146.7,151.6 R50.2@146.7,150.9
  Bottom Layer w0.2: v1(10.4,138) 10.4,138.131 24.7,152.431 24.7,161.431 40.7,177.431 40.7,183.4 42.5,185.2 92.331,185.2 94.331,183.2 102.731,183.2 105.4,180.531 105.4,176.6 108.4,173.6 v1(122.7,173.6) ; v1(122.7,167.7) 129.1,167.7 130.5,166.3 130.5,158.9 134,155.4 144.7,155.4 v1(145.6,156.3)
HAND-OUT: M1.B22 R49.2 U7.25 | length 136.7
  Top Layer w0.2: v1(72.9,110.4) v1(84.5,110.4) ; v1(84.9,137.8) 117.5,137.8 v1(126.8,147.1) ; R49.2@145.5,169.2 U7.25@145.5,166.3 145.5,165.4 v1(146.4,164.5)
  Bottom Layer w0.2: M1.B22@69.352,111.372 70.352,110.372 72.972,110.372 72.944,110.4 v1(72.9,110.4) ; v1(84.5,110.4) 85.2,111.1 85.2,137.5 v1(84.9,137.8) ; v1(126.8,147.1) 133.4,153.7 150.6,153.7 151.7,154.8 151.7,157.5 150.9,158.3 146.9,158.3 146.4,158.8 v1(146.4,164.5)
HDD-LOCK: C46.2 J2.1 R51.2 U7.10 | length 29.1
  Top Layer w0.2: J2.1@130.5,170.1 132.4,170.1 132.8,169.7 C46.2@134.7,169.7 ; R51.2@134.7,171.1 C46.2@134.7,169.7 ; U7.10@146.3,154.3 146.3,157 145.5,157.8 141,157.8 140.4,158.4 140.4,163 136.5,166.9 136.5,168.8 135.6,169.7 C46.2@134.7,169.7
HUB-RST: U13.4 U14.37 | length 4.4
  Top Layer w0.2: U14.37@65.15,163.15 65.75,163.15 66.1,163.5 v1(66.1,164)
  Bottom Layer w0.2: U13.4@65.1,166.4 65.1,165 v1(66.1,164)
I2C-SCL: M1.A37 U7.13 U28.6 | length 235.9
  Top Layer w0.2: v1(8.7,115) 8.7,115.049 9.251,115.6 10.834,115.6 11.2,115.966 11.2,123.166 13.9,125.866 v1(13.9,138.7) ; U28.6@29.435,164.3 29.435,162.665 29.9,162.2 31.6,162.2 v1(32.2,162.8) 37.4,168 43.766,168 48.566,172.8 70.751,172.8 71.051,172.5 v1(71.9,172.5) ; v1(71.2,154.3) 71.9,155 76.5,155 118.4,155 121.3,157.9 126.769,157.9 129.169,155.5 v1(130.7,155.5) ; U7.13@149.1,157.1 v1(150.8,157.1)
  Bottom Layer w0.2: M1.A37@2.3,97.2 3.3,98.2 8.1,98.2 9.1,99.2 9.1,113.4 8.7,113.8 v1(8.7,115) ; v1(13.9,138.7) 32.7,157.5 32.7,162.4 32.3,162.8 v1(32.2,162.8) ; v1(71.2,154.3) 71.2,167.3 71.9,168 v1(71.9,172.5) ; v1(130.7,155.5) 131.6,154.6 147.8,154.6 148,154.4 149.349,154.4 150.8,155.851 v1(150.8,157.1)
I2C-SDA: M1.A38 U7.12 U28.5 | length 228
  Top Layer w0.2: v1(9.5,115) 10.8,115 11.6,115.8 11.6,123 14.3,125.7 14.3,137.7 v1(14.6,138) ; U28.5@30.705,164.3 33.1,164.3 37.2,168.4 43.6,168.4 48.4,173.2 v1(71.2,173.2) ; v1(70.5,154.8) 71.1,155.4 78,155.4 118.234,155.4 121.134,158.3 126.934,158.3 128.834,156.4 v1(130.7,156.4) ; v1(149.1,155) U7.12@149.1,156.3
  Bottom Layer w0.2: M1.A38@4.3,97.2 8.2,97.2 9.5,98.5 v1(9.5,115) ; v1(14.6,138) 14.6,138.834 32.617,156.851 ; v1(32.2,164.3) 33.1,163.4 33.1,157.3 32.634,156.834 ; v1(70.5,154.8) 70.5,167.8 71.2,168.5 v1(71.2,173.2) ; v1(130.7,156.4) 132.1,155 v1(149.1,155)
IGN: Q3.1 U9.2 | length 168.1
  Top Layer w0.2: U9.2@157.55,173 v1(161.8,173)
  Bottom Layer w0.2: Q3.1@146.535,20.732 146.535,30.035 148.3,31.8 157.3,31.8 161.8,36.3 v1(161.8,173)
IGN-SIG: U7.24 U9.3 | length 14.9
  Top Layer w0.2: U7.24@146.3,166.3 146.3,167.6 146.7,168 153.7,168 154.1,168.4 154.1,172.7 154.45,173.05 U9.3@155.1,173.05
INTVCC: C35.1 D8.1 D12.1 R32.1 R36.2 U4.19 | length 21
  Top Layer w0.2: C35.1@144.7,87.5 C35.1@144.75,87.55
  Top Layer w0.254: C35.1@145.15,87.55 U4.19@147.05,87.55 148,87.55 148.142,87.692 v1(148.9,87.692)
  Top Layer w0.508: v1(144.7,88.9) 144.7,88.857 144.9,88.657 C35.1@144.9,87.5
  Bottom Layer w0.5: D8.1@141.5,85.2 140.6,86.1 140.6,88.9 140.6,89.6 D12.1@141.5,90.5
  Bottom Layer w0.508: 140.6,88.9 v1(144.7,88.9) ; v1@148.8,87.7 148.3,88.2 148.3,89.8 148.9,90.4 R36.2@150.1,90.4 ; v1@148.9,87.7 R32.1@150,87.7
IR: U7.8 U8.3 | length 67.8
  Top Layer w0.2: U7.8@144.7,154.3 v1(144.7,156.3)
  Bottom Layer w0.2: U8.3@102.6,184.6 105.1,184.6 106.6,183.1 106.6,178.9 110,175.5 137.072,175.5 139.072,173.5 140.906,173.5 142.4,172.006 142.4,166.766 142,166.366 142,165.731 141.569,165.3 141.234,165.3 140.6,164.666 140.6,163.786 141,163.386 141,160.2 144.7,156.5 v1(144.7,156.3)
NAND-ALE: M1.B26 U12.17 | length 26.8
  Bottom Layer w0.2: U12.17@58.7,94.4 58.7,106.8 59.6,107.7 61.969,107.7 69.352,115.083 M1.B26@69.352,115.372
NAND-CE: M1.B24 R53.1 U12.9 | length 25.2
  Bottom Layer w0.2: R53.1@61.8,92 61.8,92.7 62.7,93.6 U12.9@62.7,94.4 62.7,107.866 68.206,113.372 M1.B24@69.352,113.372
NAND-CLE: M1.B20 U12.16 | length 22.9
  Top Layer w0.2: v1(60,106.4) 62.972,109.372 M1.B20@69.352,109.372
  Bottom Layer w0.2: U12.16@59.2,94.4 59.2,105.6 v1(60,106.4)
NAND-RDY: M1.B25 R55.1 U12.7 | length 28.2
  Bottom Layer w0.2: R55.1@64.8,92 64.8,92.4 63.7,93.5 U12.7@63.7,94.4 63.7,103.9 64.8,105 64.8,109.4 67.772,112.372 69.872,112.372 70.352,112.852 70.352,114.372 M1.B25@71.352,115.372
NAND-RE: M1.B17 R54.1 U12.8 | length 22.4
  Top Layer w0.2: v1(64.1,106.4) 64.128,106.372 70.352,106.372 M1.B17@71.352,107.372
  Bottom Layer w0.2: R54.1@63.2,92.1 U12.8@63.2,94.4 63.2,105.5 v1(64.1,106.4)
NetBT1_1: BT1.1 D28.2 | length 7.6
  Top Layer w0.5: BT1.1@21.1,160.7 23.4,163 D28.2@23.4,167.3
NetC1_1: C1.1 D1.2 J1.4 L10.2 | length 1.1
  Top Layer w1: C1.1@160.9,30.4 v1(162,30.4)
  other v1: 156.7,41.9 157.7,41.9 158.7,41.9 159.7,41.9 156.7,42.8 157.7,42.8 158.7,42.8 159.7,42.8
NetC1_2: C1.2 D1.1 D54.1 L10.1
NetC2_1: C2.1 Q1.4 R1.1 R3.2 | length 5.6
  Top Layer w0.2: Q1.4@131.605,99.1 132.305,98.4 R1.1@133.4,98.4 ; R3.2@133.4,99.9 R1.1@133.4,98.4 ; C2.1@135.2,98.8 134.3,98.8 133.9,98.4 R1.1@133.4,98.4
NetC11_2: C11.2 Q2.2 R5.1 R6.2 | length 5.1
  Top Layer w0.2: Q2.2@137,100.6 138.6,100.6 C11.2@138.7,100.5 R5.1@138.7,98.6 R6.2@137.2,98.6
NetC12_1: C12.1 D5.1 Q3.2 R7.1 R8.1 | length 6.3
  Bottom Layer w0.2: Q3.2@147.5,18.7 150.2,18.7 D5.1@150.2,17.071 ; R7.1@150.3,15 D5.1@150.3,16.971
NetC13_1: C13.1 D7.1 Q4.2 R9.1 R10.1 | length 6.3
  Bottom Layer w0.2: Q4.2@151.2,7.6 151.3,7.5 152.5,7.5 153.9,7.5 R9.1@157.5,7.5
NetC14_1: C14.1 L1.1 U2.3
NetC14_2: C14.2 R11.1 | length 1.6
  Top Layer w0.2: C14.2@150.2,114.1 R11.1@150.2,115.7
NetC17_2: C17.2 U2.1 | length 1.4
  Top Layer w0.2: C17.2@145.2,114.8 146.3,114.8 U2.1@146.5,115
NetC18_2: C18.2 U2.7 | length 2.2
  Top Layer w0.2: U2.7@147.15,117.6 147.15,118.45 147.5,118.8 C18.2@147.5,119.7
NetC24_1: C24.1 L2.1 U3.3
NetC24_2: C24.2 R17.1 | length 1.6
  Top Layer w0.2: C24.2@150.2,130.6 R17.1@150.2,132.2
NetC27_1: C27.1 D9.1 L3.1 Q5.1 Q5.2 Q5.3 Q6. Q6.5 Q6.6 Q6.7 Q6.8 U4.22 | length 13
  Top Layer w0.254: C27.1@143.2,84.6 144.119,85.519 145.782,85.519 145.863,85.6 U4.22@147.05,85.6 147.092,85.558 147.858,85.558 147.971,85.446 148.454,85.446 149.581,84.319 149.581,80.9 150.081,80.4 D9.1@151.6,80.4
  other v1: 150.6,72.7 151.5,72.7 152.4,72.7 153.3,72.7 154.2,72.7 155.1,72.7 150.6,73.6 151.5,73.6 152.4,73.6 153.3,73.6 154.2,73.6 155.1,73.6 150.6,74.5 151.5,74.5 152.4,74.5 153.3,74.5 154.2,74.5 155.1,74.5 153.2,79.2 153.2,80 153.2,80.8 153.2,81.6
NetC27_2: C27.2 D8.2 U4.24 | length 5.3
  Top Layer w0.254: C27.2@144.8,84.6 145.1,84.6 v1(145.8,83.9) 146.2,84.3 U4.24@147.05,84.3
  Bottom Layer w0.5: D8.2@144.2,85.2 145.3,85.2 145.8,84.7 v1(145.8,83.9)
NetC28_2: C28.2 U4.2 | length 2.9
  Top Layer w0.254: U4.2@154,84.95 154.85,84.95 156,83.8 C28.2@156.4,83.8
NetC29_2: C29.2 U3.1 | length 1.5
  Top Layer w0.2: C29.2@145,131.2 U3.1@146.5,131.2
NetC30_2: C30.2 U3.7 | length 2.2
  Top Layer w0.2: U3.7@147.15,133.8 147.15,134.85 147.5,135.2 C30.2@147.5,135.9
NetC31_1: C31.1 R24.2 U4.4 | length 4
  Top Layer w0.254: U4.4@154,86.25 155.15,86.25 155.7,86.8 C31.1@156.4,86.8 R24.2@157.8,86.8